# Altium PCB PCB1.PcbDoc (part 1 of 2)
Units mil, origin at the board's own origin, x right, y up, seen from the top; angles counter-clockwise.
Board outline 2604.27 x 2454.27 mil, 4 copper layers (Top Layer, GND, Power, Bottom Layer), stack 53.912 mil thick; 71 components, 89 nets, 388 pads, 132 vias.
Unrouted connection lines stored in the file: 46.
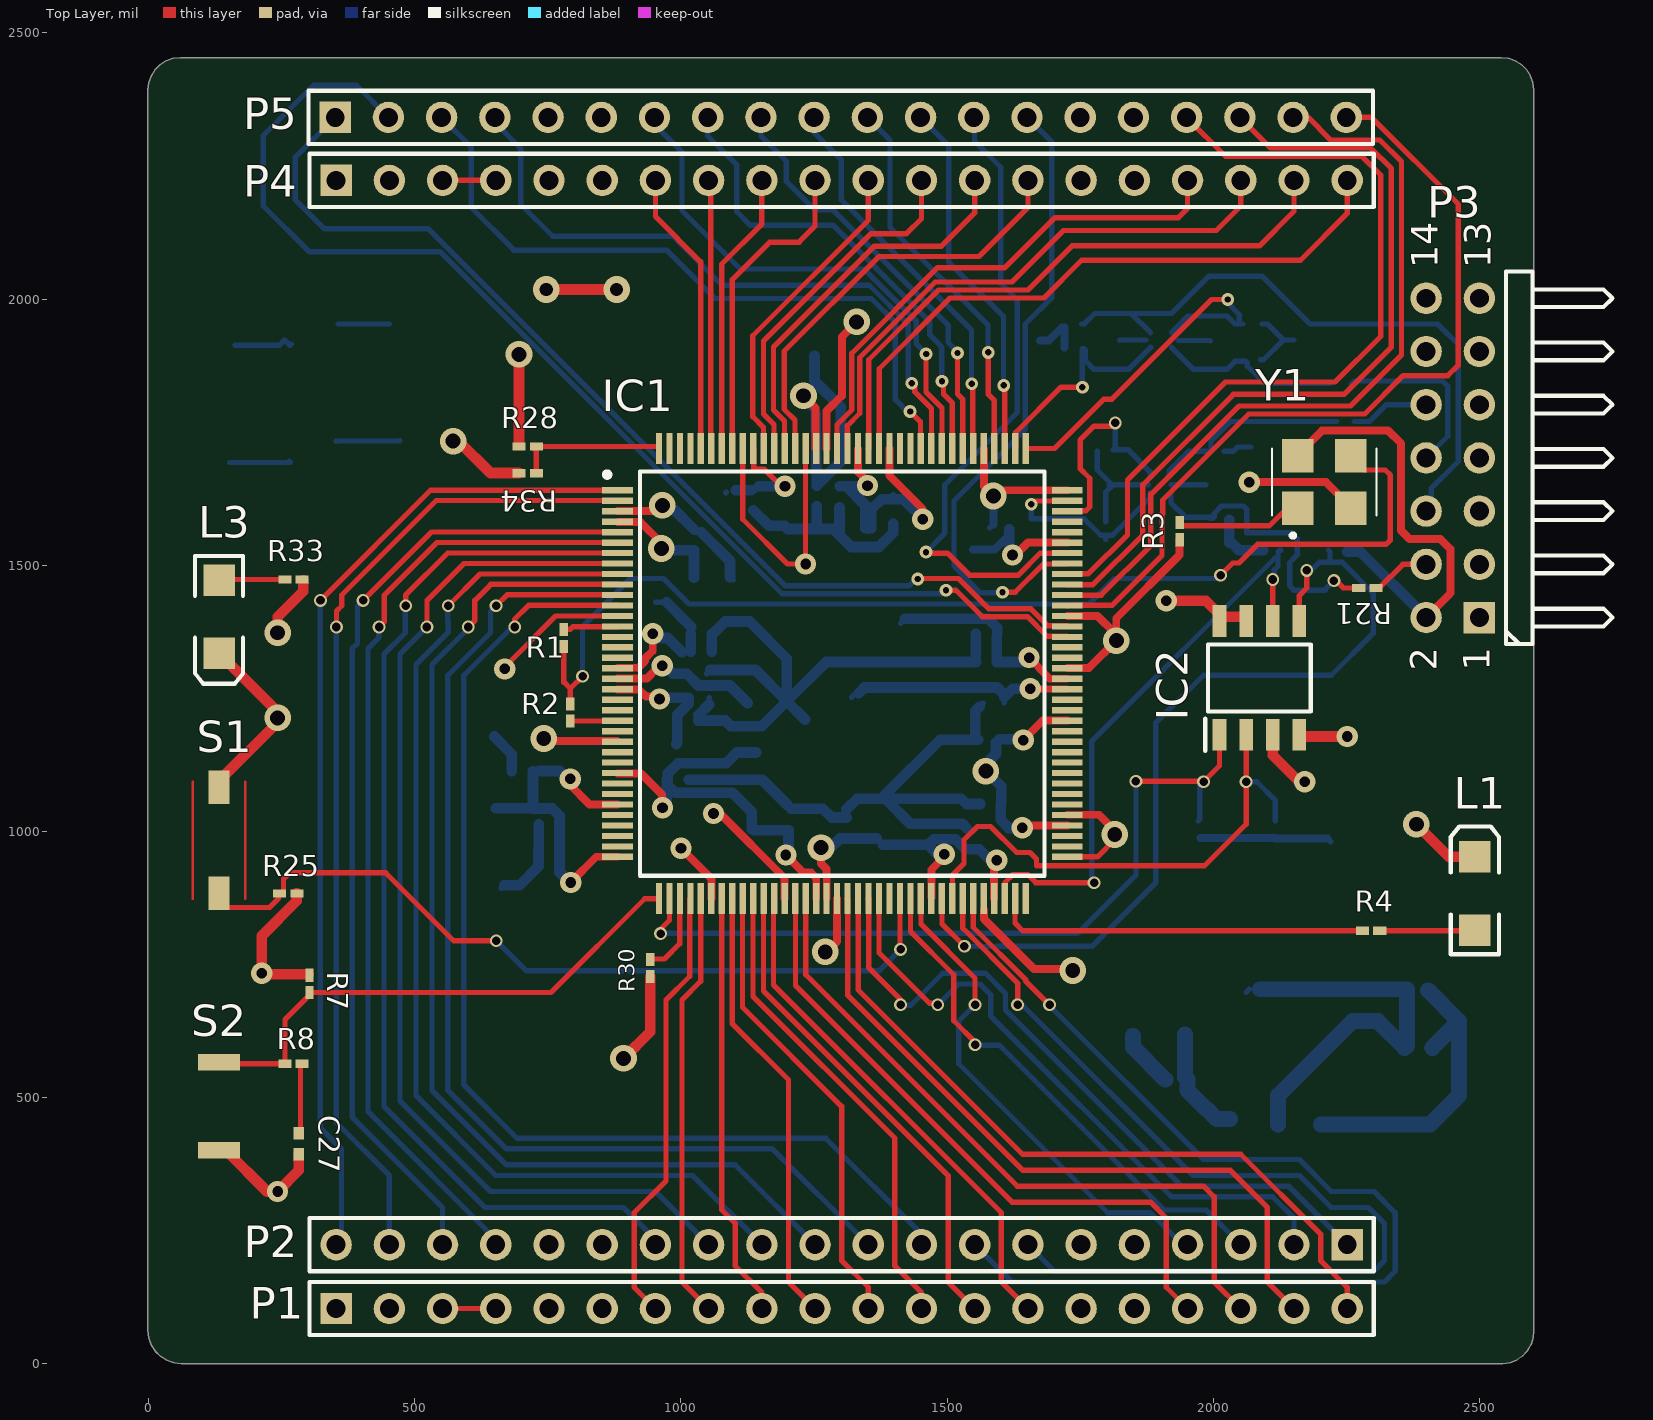
[diagram p0: Top Layer view]
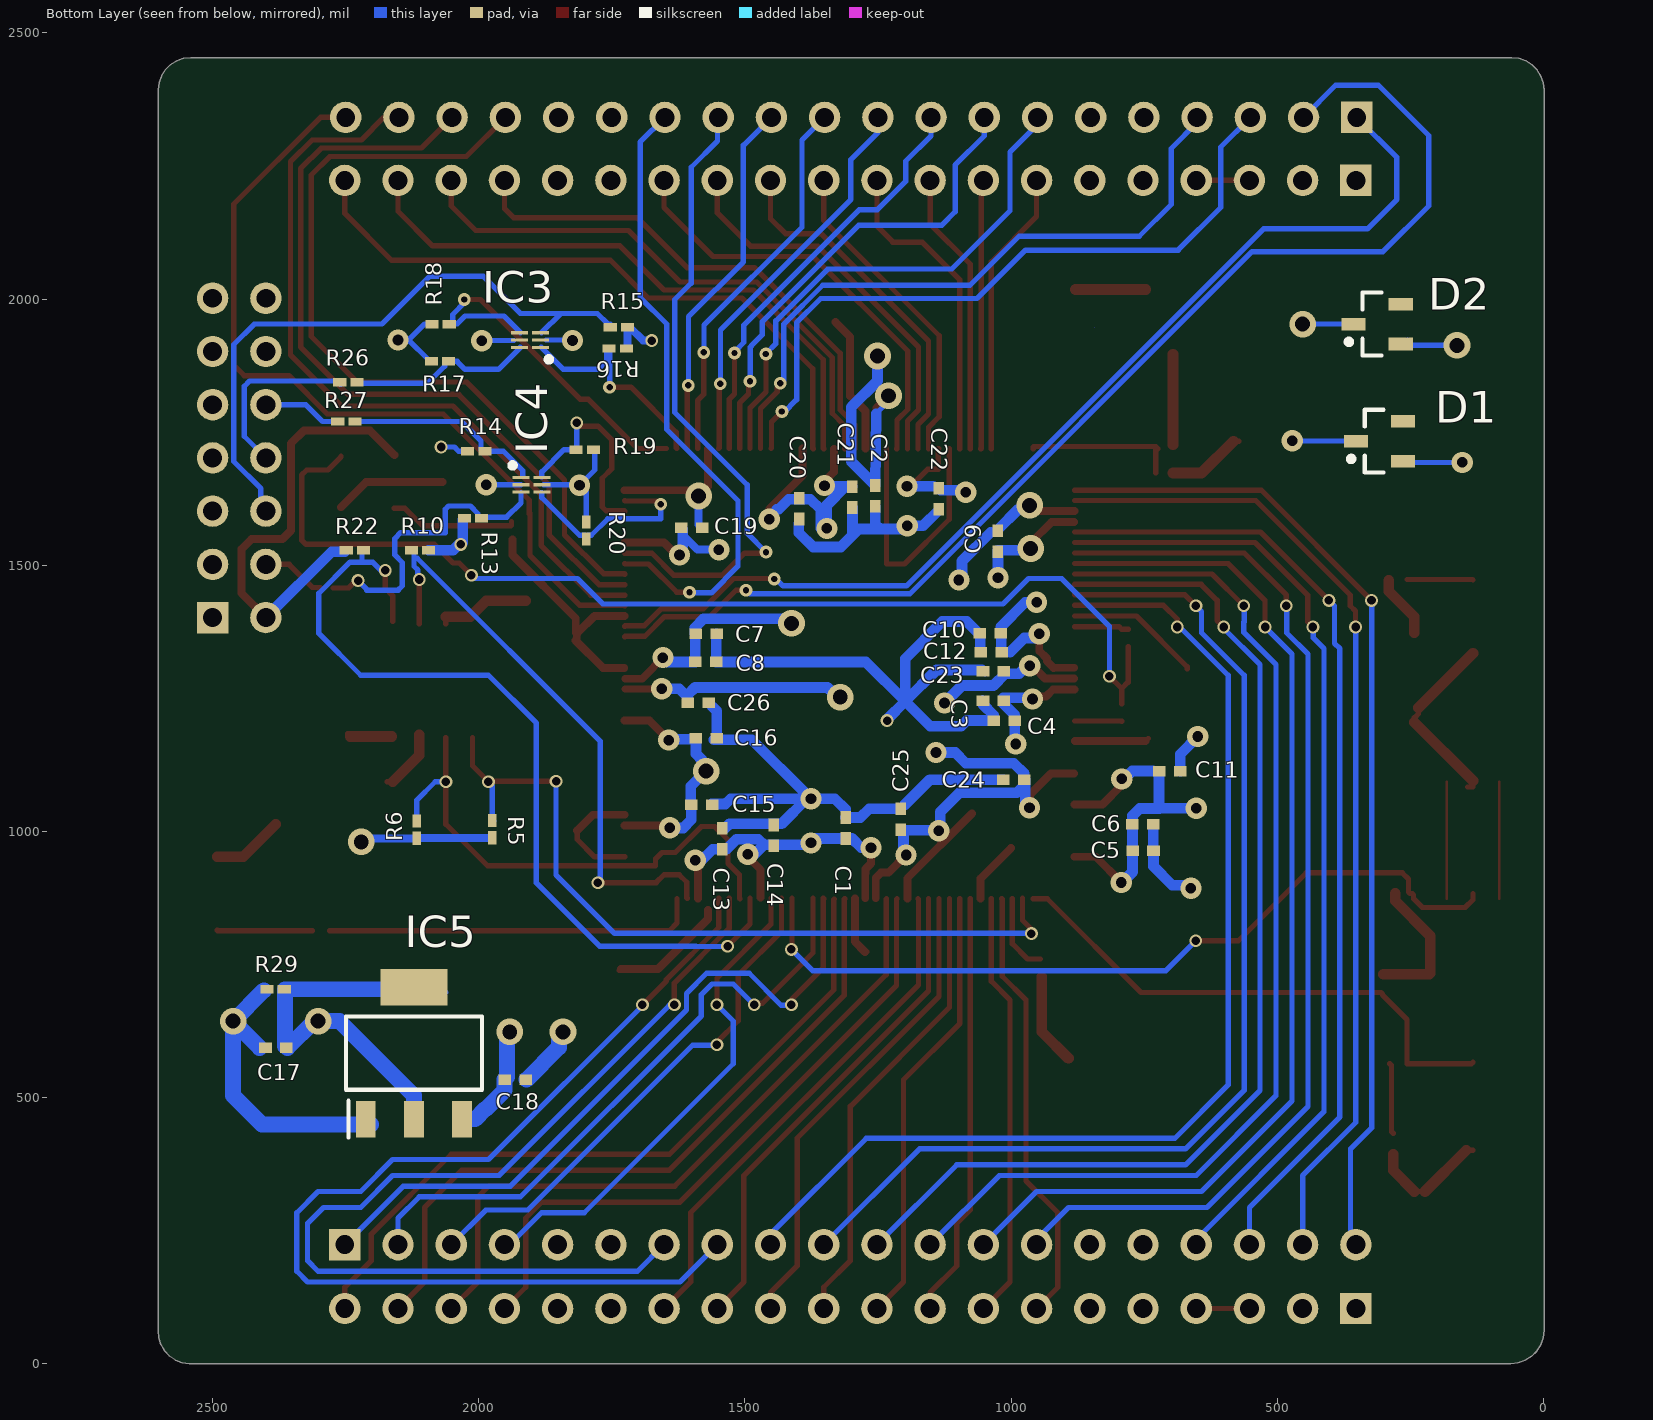
[diagram p1: Bottom Layer view, seen from below]
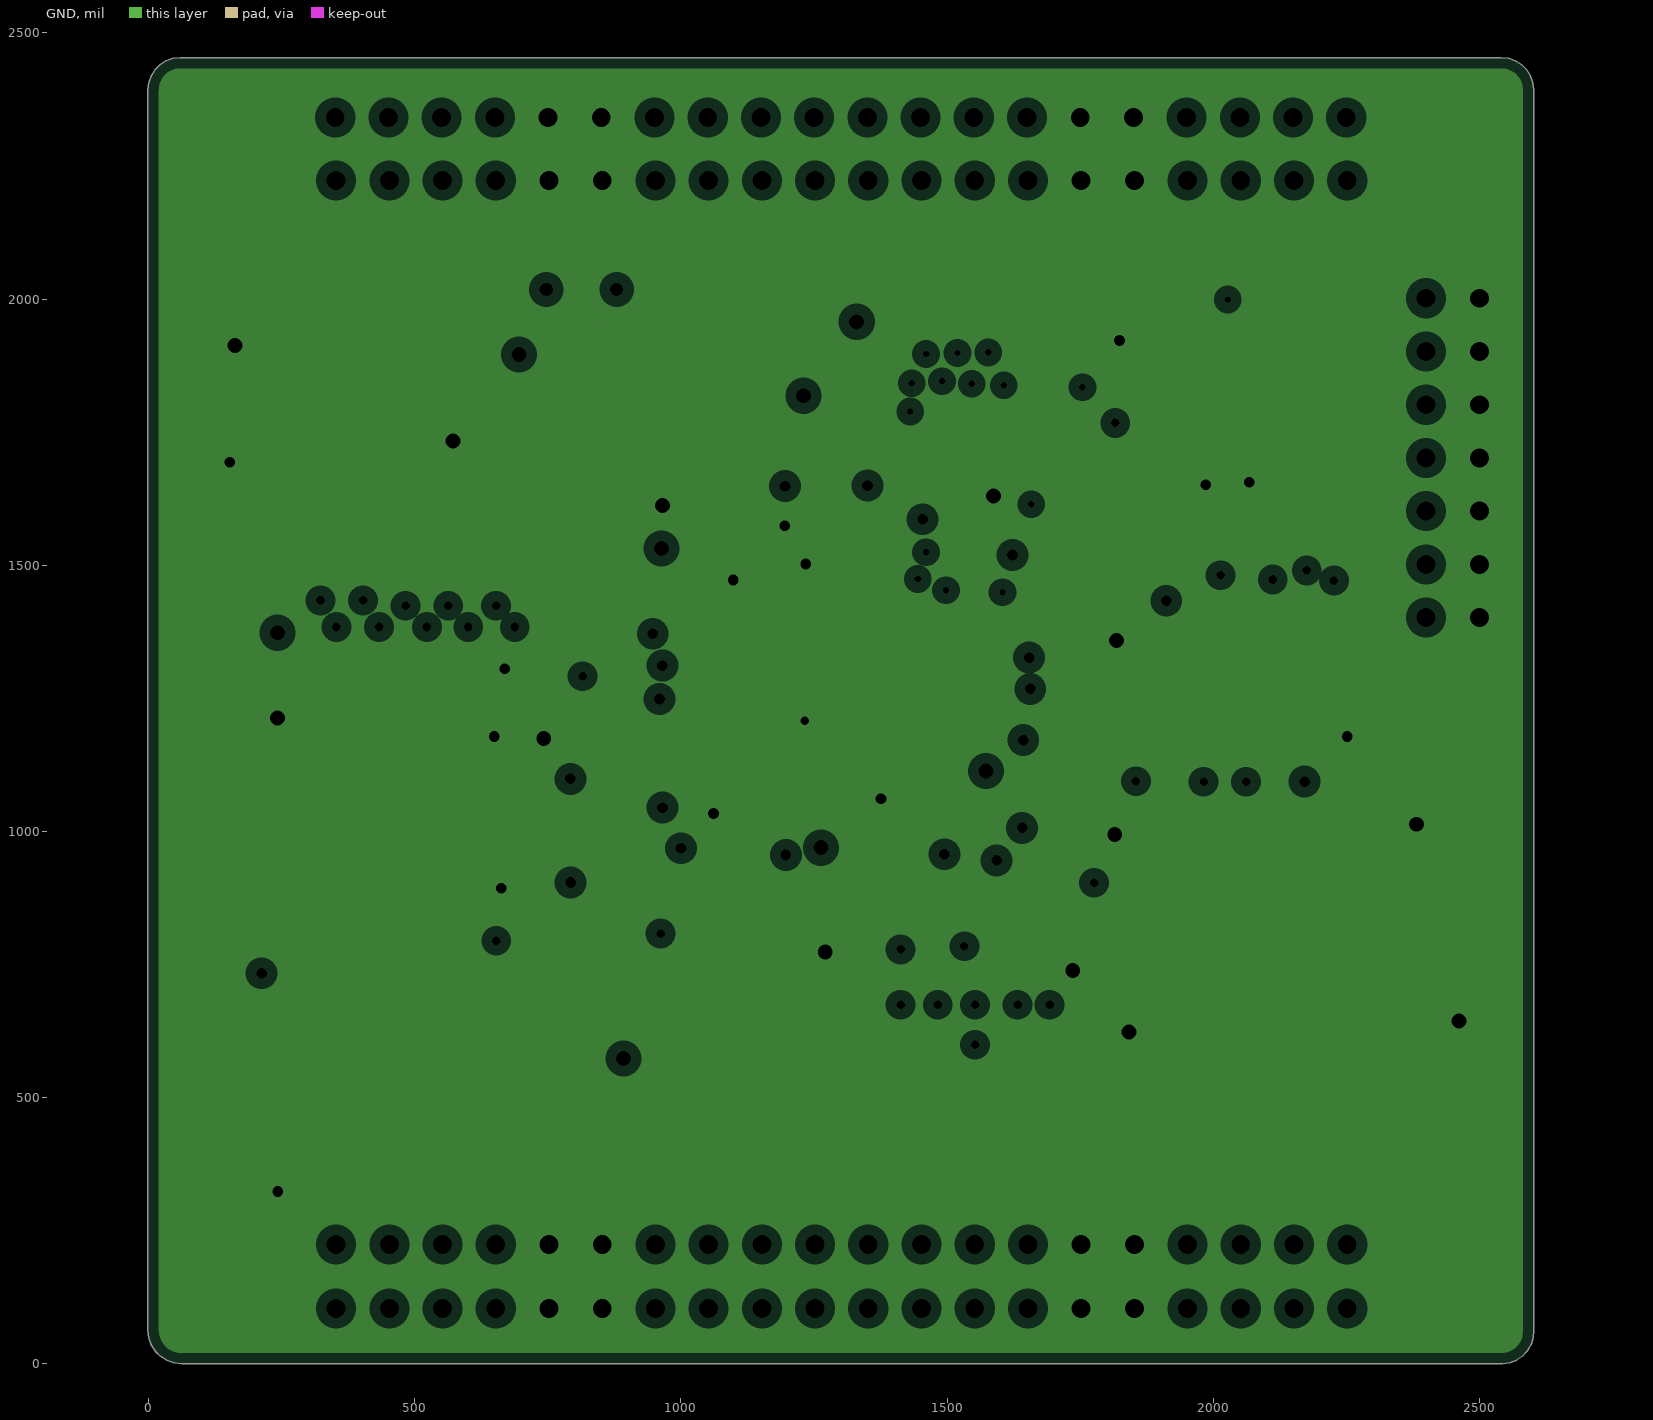
[diagram p2: GND, clearances drawn from the general rule]
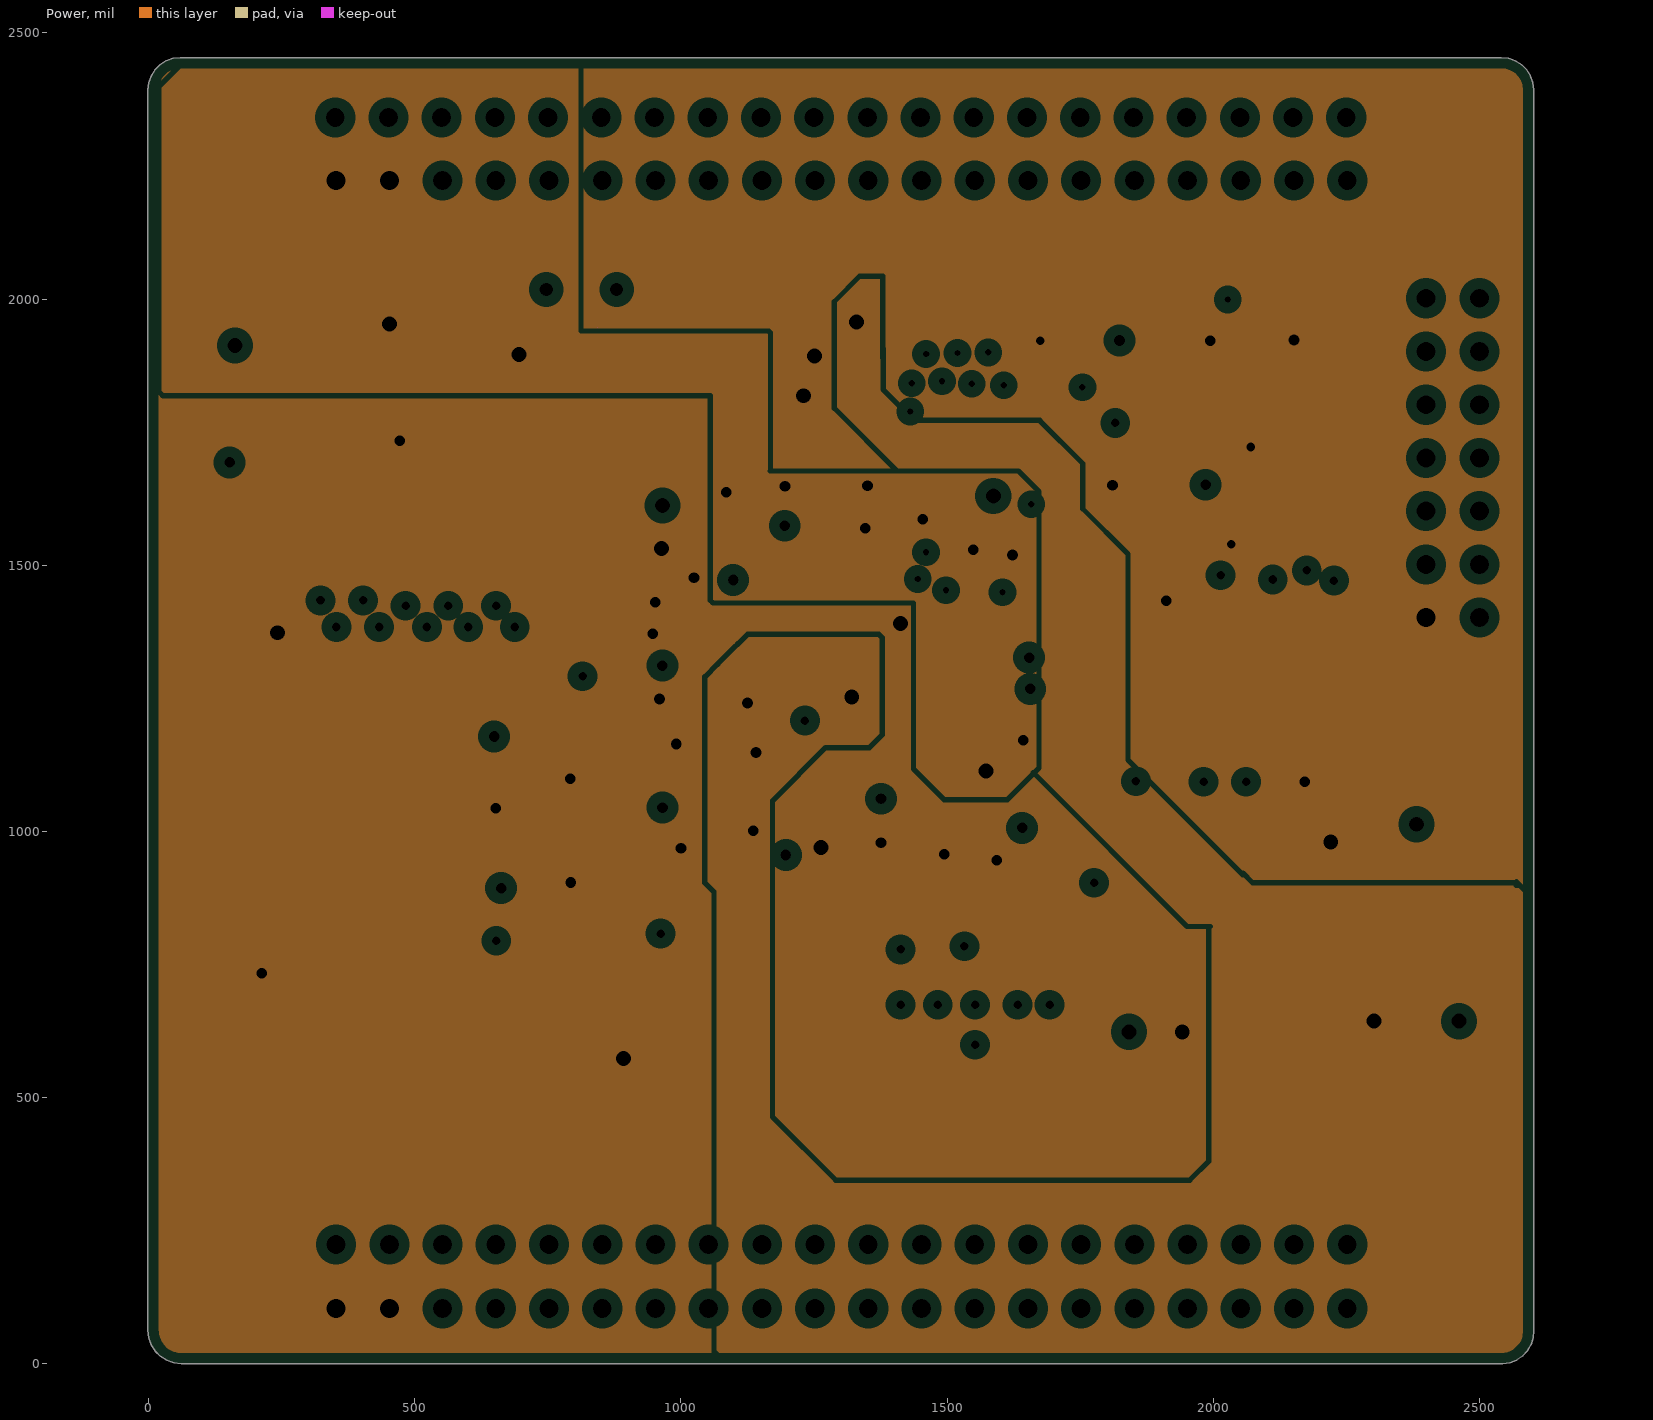
[diagram p3: Power, clearances drawn from the general rule]
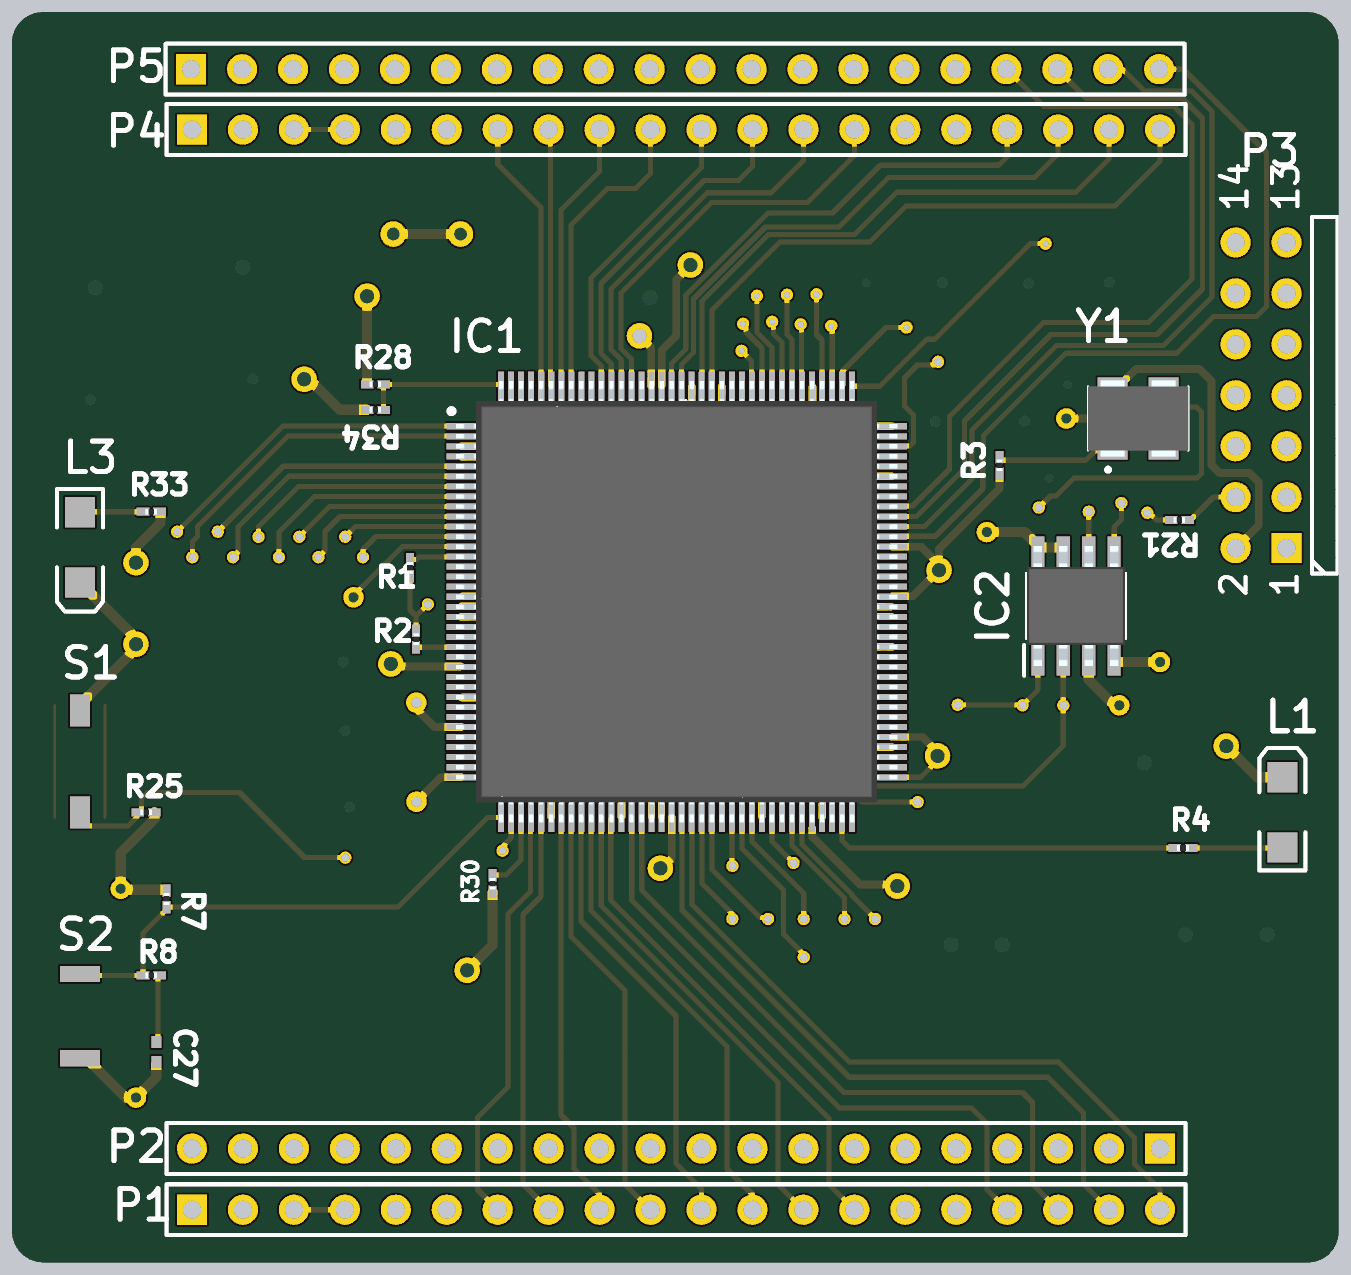
[diagram p5: 3D render of the assembled board from above, using the file's embedded part models]

## Layer stack, top to bottom
Top Solder: solder mask 1, SM-001, Dk 4
Top Layer: signal copper 1.3779
Dielectric 1: prepreg 5.1, PP-017, Dk 4.3
Dielectric 2: prepreg 5.1, PP-017, Dk 4.3
GND: plane copper 1.3779, net GND
Dielectric 3: core 28, Core-039, Dk 4.8
Power: plane copper 1.3779, net (Multiple Nets)
Dielectric 4: prepreg 5.1, PP-017, Dk 4.3
Dielectric 5: prepreg 5.1, PP-017, Dk 4.3
Bottom Layer: signal copper 1.3779
Bottom Solder: solder mask 1, SM-001, Dk 4

## Board outline
2602.59,61.43 2602.59,2393.3 2602.59,2393.32 2600.96,2406.84 2596.37,2419.66 2589.03,2431.14 2579.33,2440.7 2567.74,2447.86 2554.85,2452.26 2541.3,2453.69 59.11,2453.69 45.58,2452.16 32.73,2447.67 21.21,2440.43 11.58,2430.8 4.34,2419.28 -0.15,2406.43 -1.68,2392.9 -1.68,61.9 -0.08,47.98 4.57,34.76 12.04,22.9 21.97,13.01 33.85,5.57 47.08,0.97 61.01,-0.58 2544.31,-0.58 2544.37,-0.58 2557.7,1.35 2570.26,6.2 2581.43,13.72 2590.65,23.54 2597.46,35.17 2601.5,48.01
cut-out: 1373,-289
cut-out: 844,1946

## Design rules (kind name [scope] priority, off if disabled: settings)
Clearance [All] p1: gap=5 ignorepadtopadclearanceinfootprint=FALSE
HoleToHoleClearance [All] p1: gap=5 allowstackedmicrovias=TRUE
MinimumSolderMaskSliver [All] p1: minsoldermaskwidth=5
PlaneClearance [All] p1: clearance=20
PlaneConnect [All] p1: planeconnectstyle=Relief reliefexpansion=20 reliefentries=4 reliefconductorwidth=10 reliefairgap=10
PolygonConnect [All] p1: connectstyle=Relief reliefconductorwidth=10 reliefentries=4 polygonreliefangle="90 Angle" airgapwidth=10
RoutingVias [All] p1: holewidth=16 width=24 viastyle="Through Hole" minholewidth=16 minwidth=24 maxholewidth=28 maxwidth=50
SilkToSilkClearance [All] p1: silktosilkclearance=5
SilkToSolderMaskClearance [IsPad] p1: minsilkscreentomaskgap=5 clearancetoexposedcopper=TRUE
SolderMaskExpansion [All] p1: expansion=4
Width [All] p1: maxlimit=30 minlimit=10 preferedwidth=10
24 further rules are at their usual default settings.

## Components (designator, comment, footprint, x,y, rotation, side; value= is the part's Value field where it differs from the comment)
C1 "4.7μF" 0402 1311,1006 r270 bottom
C2 "4.7μF" 0402 1255,1630 r90 bottom
C3 "4.7μF" 0402 1033,1245 r180 bottom
C4 "4.7μF" 0402 1013,1208 r180 bottom
C5 "4.7μF" 0402 752,963 r0 bottom
C6 "4.7μF" 0402 752.31,1013 r0 bottom
C7 "4.7μF" 0402 1573,1371 r0 bottom
C8 "0.47μF" 0402 1574,1318 r0 bottom
C9 "4.7μF" 0402 1025,1545 r270 bottom
C10 "0.47μF" 0402 1039.03,1371.66 r180 bottom
C11 "0.47μF" 0402 702,1113 r0 bottom
C12 "4.7μF" 0402 1037,1336 r180 bottom
C13 "0.47μF" 0402 1543,986 r270 bottom
C14 "0.47μF" 0402 1446,992 r270 bottom
C15 "4.7μF" 0402 1581,1050 r0 bottom
C16 "0.47μF" 0402 1573,1175 r0 bottom
C17 "16V 226" 0402 2381.37,593 r180 bottom
C18 "Cap Semi" 0402 1932,533 r0 bottom value="16V 226"
C19 "0.47μF" 0402 1600,1570 r0 bottom
C20 "4.7μF" 0402 1398,1606.32 r90 bottom
C21 "0.47μF" 0402 1298,1628 r90 bottom
C22 "0.47μF" 0402 1136,1625 r90 bottom
C23 "4.7μF" 0402 1033,1301 r180 bottom
C24 "4.7μF" 0402 995,1097 r180 bottom
C25 "4.7μF" 0402 1207,1022.69 r270 bottom
C26 "0.47μF" 0402 1588,1241 r0 bottom
C27 "10μF" 0402 282,412.68 r90 top
D1 "Diode BBY31" SOT23_N 307.71,1733 r0 bottom
D2 "Diode BBY31" SOT23_N 312,1953 r0 bottom
IC1 "XC6SLX9-2TQG144C" QFP50P2200X2200X160-144N 1303.21,1296.24 r0 top locked
IC2 "M25P16-VMN6P" SOIC127P600X175-8N 2087,1288 r90 top
IC3 "SN74LVC2G17DSFR" SON35P100X100X40-6N 1904,1923 r0 bottom
IC4 "SN74LVC2G17DSFR" SON35P100X100X40-6N 1901.32,1651 r180 bottom
IC5 "TLV1117LV12DCYR" SOT230P700X180-4N 2122,583 r90 bottom
L1 "LED2" 3.2X1.6X1.1 2492,883 r90 top
L3 "LED2" 3.2X1.6X1.1 132,1403 r270 top
P1 "Header 20" HDR1X20 352,103 r0 top locked
P2 "Header 20" HDR1X20 2252,223 r180 top locked
P3 "JTAG" HDR2X7H 2500.31,1401.5 r90 top
P4 "Header 20" HDR1X20 352,2223 r0 top locked
P5 "Header 20" HDR1X20 350.31,2341.5 r0 top
R1 "47" RESC0603X28N 780,1363 r270 top
R2 "47" RESC0603X28N 792,1223 r90 top
R3 "000" RESC0603X28N 1937,1564 r270 top
R4 "102" RESC0603X28N 2297,813 r0 top
R5 "222" RESC0603X28N 1975,1004 r90 bottom
R6 "222" RESC0603X28N 2117,1003 r90 bottom
R7 "100" RESC0603X28N 302,713 r90 top
R8 "10K" RESC0603X28N 272,563 r180 top
R10 "222" RESC0603X28N 2110.78,1528 r0 bottom
R13 "102" RESC0603X28N 2011,1588 r0 bottom
R14 "102" RESC0603X28N 2005,1714 r0 bottom
R15 "102" RESC0603X28N 1737,1947 r180 bottom
R16 "102" RESC0603X28N 1739,1907 r180 bottom
R17 "102" RESC0603X28N 2073.22,1883 r0 bottom
R18 "102" RESC0603X28N 2072,1953 r0 bottom
R19 "102" RESC0603X28N 1801,1717 r180 bottom
R20 "102" RESC0603X28N 1798,1565 r90 bottom
R21 "47" RESC0603X28N 2290,1457 r0 top
R22 "222" RESC0603X28N 2233,1528 r180 bottom
R25 "4700" RESC0603X28N 262,883 r180 top
R26 "47" RESC0603X28N 2245.22,1844 r0 bottom
R27 "47" RESC0603X28N 2249,1770 r0 bottom
R28 "102" RESC0603X28N 712,1723 r0 top
R29 "102" RESC0603X28N 2382,703 r180 bottom
R30 "4700" RESC0603X28N 942,743 r90 top
R33 "102" RESC0603X28N 272,1473 r0 top
R34 "102" RESC0603X28N 712,1673 r0 top
S1 "CHS-01TA" CHS-01TA 132,983 r0 top
S2 "SKRKAEE010" SKRK 132,483 r90 top
Y1 "144-5018" 1445018 2209,1656 r0 top

## Footprints (in the part's own frame and the unit in brackets; to place one, negate y for a bottom-side part, rotate by r counter-clockwise, add the part's x,y. Pads: shape width x height; smd on the part's side, far side on the other; paste and mask are expansions set on the pad)
3.2X1.6X1.1 [mm] "SMT LED; 2 Flat Leads"
  rect 1.5x1.5 smd: 1(-1.75,0) 2(1.75,0)
  silkscreen extent -2.9,-1.15 3.2,1.15
0402 [mm] "Chip Capacitor, Body 1.0x0.5mm, IPC High Density"
  rect 0.6x0.5 smd: 1(-0.5,0) 2(0.5,0)
  body extent -0.55,-0.3 0.55,0.3, height 1.3
1445018 [mm]
  rect 1.5x1.6 smd: 1(-1.27,-1.25) 2(1.27,-1.25) 3(1.27,1.25) 4(-1.27,1.25)
  silkscreen extent -2.5,-2.6 2.5,1.6, body extent -2.5,-1.9 2.5,1.9, height 1.2
CHS-01TA [mm]
  rect 1x1.6 smd: S0(0,-2.54) SI(0,2.54)
  Top Layer lines w0.127: -1.25,-2.8 -1.25,2.8 ; 1.25,-2.8 1.25,2.8
HDR1X20 [mm] "Connector; Header; 20 Position"
  rect 1.5x1.5 hole 0.9: 1(0,0)
  round 1.5 hole 0.9: 2(2.54,0) 3(5.08,0) 4(7.62,0) 5(10.16,0) 6(12.7,0) 7(15.24,0) 8(17.78,0) 9(20.32,0) 10(22.86,0) 11(25.4,0) 12(27.94,0) 13(30.48,0) 14(33.02,0) 15(35.56,0) 16(38.1,0) 17(40.64,0) 18(43.18,0) 19(45.72,0) 20(48.26,0)
  silkscreen extent -1.27,-1.27 49.53,1.27
HDR2X7H [mm] "Connector; Header; 7x2 Position; Right Angle"
  rect 1.5x1.5 hole 0.9: 1(0,0)
  round 1.5 hole 0.9: 2(0,2.54) 3(2.54,0) 4(2.54,2.54) 5(5.08,0) 6(5.08,2.54) 7(7.62,0) 8(7.62,2.54) 9(10.16,0) 10(10.16,2.54) 11(12.7,0) 12(12.7,2.54) 13(15.24,0) 14(15.24,2.54)
  silkscreen extent -1.27,-6.35 16.51,-1.27
QFP50P2200X2200X160-144N [mm]
  rect 1.475x0.3 smd: 1(-10.738,8.75) 2(-10.738,8.25) 3(-10.738,7.75) 4(-10.738,7.25) 5(-10.738,6.75) 6(-10.738,6.25) 7(-10.738,5.75) 8(-10.738,5.25) 9(-10.738,4.75) 10(-10.738,4.25) 11(-10.738,3.75) 12(-10.738,3.25) 13(-10.738,2.75) 14(-10.738,2.25) 15(-10.738,1.75) 16(-10.738,1.25) 17(-10.738,0.75) 18(-10.738,0.25) 19(-10.738,-0.25) 20(-10.738,-0.75) 21(-10.738,-1.25) 22(-10.738,-1.75) 23(-10.738,-2.25) 24(-10.738,-2.75) 25(-10.738,-3.25) 26(-10.738,-3.75) 27(-10.738,-4.25) 28(-10.738,-4.75) 29(-10.738,-5.25) 30(-10.738,-5.75) 31(-10.738,-6.25) 32(-10.738,-6.75) 33(-10.738,-7.25) 34(-10.738,-7.75) 35(-10.738,-8.25) 36(-10.738,-8.75) 73(10.738,-8.75) 74(10.738,-8.25) 75(10.738,-7.75) 76(10.738,-7.25) 77(10.738,-6.75) 78(10.738,-6.25) 79(10.738,-5.75) 80(10.738,-5.25) 81(10.738,-4.75) 82(10.738,-4.25) 83(10.738,-3.75) 84(10.738,-3.25) 85(10.738,-2.75) 86(10.738,-2.25) 87(10.738,-1.75) 88(10.738,-1.25) 89(10.738,-0.75) 90(10.738,-0.25) 91(10.738,0.25) 92(10.738,0.75) 93(10.738,1.25) 94(10.738,1.75) 95(10.738,2.25) 96(10.738,2.75) 97(10.738,3.25) 98(10.738,3.75) 99(10.738,4.25) 100(10.738,4.75) 101(10.738,5.25) 102(10.738,5.75) 103(10.738,6.25) 104(10.738,6.75) 105(10.738,7.25) 106(10.738,7.75) 107(10.738,8.25) 108(10.738,8.75)
  rect 0.3x1.475 smd: 37(-8.75,-10.738) 38(-8.25,-10.738) 39(-7.75,-10.738) 40(-7.25,-10.738) 41(-6.75,-10.738) 42(-6.25,-10.738) 43(-5.75,-10.738) 44(-5.25,-10.738) 45(-4.75,-10.738) 46(-4.25,-10.738) 47(-3.75,-10.738) 48(-3.25,-10.738) 49(-2.75,-10.738) 50(-2.25,-10.738) 51(-1.75,-10.738) 52(-1.25,-10.738) 53(-0.75,-10.738) 54(-0.25,-10.738) 55(0.25,-10.738) 56(0.75,-10.738) 57(1.25,-10.738) 58(1.75,-10.738) 59(2.25,-10.738) 60(2.75,-10.738) 61(3.25,-10.738) 62(3.75,-10.738) 63(4.25,-10.738) 64(4.75,-10.738) 65(5.25,-10.738) 66(5.75,-10.738) 67(6.25,-10.738) 68(6.75,-10.738) 69(7.25,-10.738) 70(7.75,-10.738) 71(8.25,-10.738) 72(8.75,-10.738) 109(8.75,10.738) 110(8.25,10.738) 111(7.75,10.738) 112(7.25,10.738) 113(6.75,10.738) 114(6.25,10.738) 115(5.75,10.738) 116(5.25,10.738) 117(4.75,10.738) 118(4.25,10.738) 119(3.75,10.738) 120(3.25,10.738) 121(2.75,10.738) 122(2.25,10.738) 123(1.75,10.738) 124(1.25,10.738) 125(0.75,10.738) 126(0.25,10.738) 127(-0.25,10.738) 128(-0.75,10.738) 129(-1.25,10.738) 130(-1.75,10.738) 131(-2.25,10.738) 132(-2.75,10.738) 133(-3.25,10.738) 134(-3.75,10.738) 135(-4.25,10.738) 136(-4.75,10.738) 137(-5.25,10.738) 138(-5.75,10.738) 139(-6.25,10.738) 140(-6.75,10.738) 141(-7.25,10.738) 142(-7.75,10.738) 143(-8.25,10.738) 144(-8.75,10.738)
  silkscreen extent -11.35,-9.65 9.65,9.65, body extent -11,-11 11,11, height 1.6
RESC0603X28N [mm]
  rect 0.625x0.4 smd: 1(-0.412,0) 2(0.412,0)
  body extent -0.29,-0.15 0.29,0.15, height 0.28
SKRK [mm]
  rect 0.8x2 smd: 1(-2.1,0) 2(2.1,0)
SOIC127P600X175-8N [mm]
  rect 1.525x0.65 smd: 1(-2.712,1.905) 2(-2.712,0.635) 3(-2.712,-0.635) 4(-2.712,-1.905) 5(2.712,-1.905) 6(2.712,-0.635) 7(2.712,0.635) 8(2.712,1.905)
  silkscreen extent -3.47,-2.45 1.6,2.58, body extent -3,-2.45 3,2.45, height 1.75
SON35P100X100X40-6N [mm]
  rect 0.8x0.15 smd: 1(-0.5,0.35) 2(-0.5,0) 3(-0.5,-0.35) 4(0.5,-0.35) 5(0.5,0) 6(0.5,0.35)
  silkscreen extent -1.02,0.8 -0.77,1.05, body extent -0.55,-0.5 0.55,0.5, height 0.4
SOT23_N [mm] "SOT23, 3-Leads, Body 2.9x1.3mm, Pitch 0.95mm, Lead Span 2.3mm - Reverse Pinning, IPC Medium Density"
  rect 1.15x0.6 smd: 1(1.125,0) 2(-1.125,-0.95) 3(-1.125,0.95)
  silkscreen extent -0.2,-1.5 1.48,1.5, body extent -0.7,-1.5 0.7,1.5, height 1.1
SOT230P700X180-4N [mm]
  rect 1.75x0.95 smd: 1(-3.15,2.3) 2(-3.15,0) 3(-3.15,-2.3)
  rect 1.75x3.2 smd: 4(3.15,0)
  silkscreen extent -4.02,-3.25 1.75,3.25, body extent -3.5,-3.25 3.5,3.25, height 1.8

## Part data
C1 C2 C3 C4 C5 C6 C7 C8 C9 C10 C11 C12 C13 C14 C15 C16 C17 C19 C20 C21 C22 C23 C24 C25 C26 C27: library part "Cap Semi", "Capacitor (Semiconductor SIM Model)", LatestRevisionDate=29-May-2009, LatestRevisionNote="IPC-7351 Footprint Added.", PackageDescription="Chip Capacitor", PackageReference=C1206, Published=8-Jun-2000, Publisher="Altium Limited"
C18: "Capacitor (Semiconductor SIM Model)", LatestRevisionDate=29-May-2009, LatestRevisionNote="IPC-7351 Footprint Added.", PackageDescription="Chip Capacitor", PackageReference=C1206, Published=8-Jun-2000, Publisher="Altium Limited"
D1 D2: "SOT23 Silicon Planar Variable Capacitance Diode", ComponentLink1Description="Manufacturer Link", ComponentLink1URL=http://www.zetex.com/, ComponentLink2Description=Datasheet, ComponentLink2URL=www.zetex.com/3.0/pdf/BBY31.pdf, DatasheetVersion=Jan-1998, LatestRevisionDate=29-May-2009, LatestRevisionNote="IPC-7351 Footprint Added.", Note="Pin 2 is not connected and not drawn.", PackageDescription="3-Pin SOT-23 Package 0.95 mm Pitch, 2.3 mm Lead Span - Reverse Pinning", PackageReference=SOT23, PackageVersion=1996, Published=8-Jun-2000, Publisher="Altium Limited"
IC1: "Integrated Circuit", Manufacturer_Name=XILINX, Mouser Part Number=217-XC6SLX9-2TQG144C, RS Part Number=7276011P, Datasheet Link=https://www.xilinx.com/support/documentation/data_sheets/ds160.pdf, Height=1.6mm, Manufacturer_Part_Number=XC6SLX9-2TQG144C, Mouser Price/Stock=https://www.mouser.com/Search/Refine.aspx?Keyword=217-XC6SLX9-2TQG144C, RS Price/Stock=http://uk.rs-online.com/web/p/products/7276011P
IC2: "Integrated Circuit", Manufacturer_Name=Micron, Mouser Part Number=340-180484, RS Part Number=7824601P, Datasheet Link=https://www.micron.com/~/media/documents/products/data-sheet/nor-flash/serial-nor/m25p/m25p16.pdf, Height=1.75mm, Manufacturer_Part_Number=M25P16-VMN6P, Mouser Price/Stock=https://www.mouser.com/Search/Refine.aspx?Keyword=340-180484, RS Price/Stock=http://uk.rs-online.com/web/p/products/7824601P
IC3 IC4: "Integrated Circuit", Manufacturer_Name="Texas Instruments", Mouser Part Number=595-SN74LVC2G17DSFR, Datasheet Link=http://www.ti.com/lit/gpn/sn74lvc2g17, Height=0.4mm, Manufacturer_Part_Number=SN74LVC2G17DSFR, Mouser Price/Stock=https://www.mouser.com/Search/Refine.aspx?Keyword=595-SN74LVC2G17DSFR
IC5: "Integrated Circuit", Manufacturer_Name="Texas Instruments", Mouser Part Number=595-TLV1117LV12DCYR, RS Part Number=8253628P, Datasheet Link=http://www.ti.com/lit/gpn/tlv1117lv, Height=1.8mm, Manufacturer_Part_Number=TLV1117LV12DCYR, Mouser Price/Stock=https://www.mouser.com/Search/Refine.aspx?Keyword=595-TLV1117LV12DCYR, RS Price/Stock=http://uk.rs-online.com/web/p/products/8253628P
L1 L3: "Typical RED, GREEN, YELLOW, AMBER GaAs LED", LatestRevisionDate=17-Jul-2002, LatestRevisionNote="Re-released for DXP Platform.", PackageDescription="SM LED; 2 Flat Leads", PackageReference=3.2X1.6X1.1, PackageVersion=Feb-2002, Published=8-Jun-2000, Publisher="Altium Limited"
P1 P2 P4 P5: "Header, 20-Pin", LatestRevisionDate=17-Jul-2002, LatestRevisionNote="Re-released for DXP Platform.", Publisher="Altium Limited"
P3: library part "Header 7X2H", "Header, 7-Pin, Dual row, Right Angle", LatestRevisionDate=17-Jul-2002, LatestRevisionNote="Re-released for DXP Platform.", Publisher="Altium Limited"
R1 R2 R3 R4 R5 R6 R7 R8 R10 R13 R14 R15 R16 R17 R18 R19 R20 R21 R22 R25 R26 R27 R28 R29 R30 R33 R34: library part CPF0201D100RE1, "Resistor", Manufacturer_Name="TE Connectivity", Mouser Part Number=279-CPF0201D100RE1, RS Part Number=7549192, Datasheet Link=http://www.te.com/commerce/DocumentDelivery/DDEController?Action=showdoc&DocId=Data+Sheet%7F1773200-1%7FA%7Fpdf%7FEnglish%7FENG_DS_1773200-1_A.pdf%7F4-2176215-6, Height=0.28mm, Manufacturer_Part_Number=CPF0201D100RE1, Mouser Price/Stock=https://www.mouser.com/Search/Refine.aspx?Keyword=279-CPF0201D100RE1, RS Price/Stock=http://uk.rs-online.com/web/p/products/7549192
S1: "Dip Switch SPST 1 Position Surface Mount Slide _Standard_ Actuator 100mA 6VDC", Package=None, Availability=Unavailable, MF="Nidec Copal", MP=CHS-01TA, Price=None, SnapEDA_Link=https://www.snapeda.com/parts/CHS-01TA/Nidec%20Copal%20Electronics/view-part/2873101/?ref=snap
S2: "Switch Tactile N.O. SPST Round Button Gull Wing 0.05A 12VDC 1.57N SMD T/R", Package=None, Availability=Unavailable, MF=ALPS, MP=SKRKAEE010, Price=None, SnapEDA_Link=https://www.snapeda.com/parts/SKRKAEE010/ALPS/view-part/380772/?ref=snap
Y1: "Crystal or Oscillator", Manufacturer_Name="RS Components", Datasheet Link=https://docs-emea.rs-online.com/webdocs/15dc/0900766b815dc7b7.pdf, Height=1.1mm, Manufacturer_Part_Number=144-5018

## Via types
v1: diameter 24, hole 16, Top Layer to Bottom Layer, 29 vias
v2: diameter 40, hole 20, Top Layer to Bottom Layer, 17 vias
v3: diameter 40, hole 20, Power to Bottom Layer, 16 vias
v4: diameter 24, hole 12, Top Layer to Bottom Layer, 15 vias
v5: diameter 50, hole 28, Power to Bottom Layer, 8 vias
v6: diameter 50, hole 28, Top Layer to GND, 8 vias
v7: diameter 40, hole 20, GND to Bottom Layer, 8 vias
v8: diameter 50, hole 28, Top Layer to Power, 7 vias
v9: diameter 40, hole 20, Top Layer to GND, 6 vias
v10: diameter 40, hole 20, Top Layer to Power, 4 vias
v11: diameter 50, hole 28, GND to Bottom Layer, 4 vias
v12: diameter 50, hole 28, Top Layer to Bottom Layer, 3 vias
v13: diameter 24, hole 16, Power to Bottom Layer, 3 vias
v14: diameter 50, hole 25, Top Layer to Power, 2 vias
v15: diameter 24, hole 16, GND to Bottom Layer, 1 vias
v16: diameter 24/24 (per signal layer), hole 16, Top Layer to Bottom Layer, 1 vias

## Nets (pads, with @x,y where several pads share a name; then routed paths per layer and width w, separated by ;. In a path a pad name is that pad's centre, name@x,y a point inside that pad or via, vN(x,y) a via of type N, cw(c..) or ccw(c..) an arc to the next point about the centre after c; other vN are vias at no path point)
GCLK_50A: IC1.14 R1.1 | length 102.2
  Top Layer w10: R1.1@780,1379.22 792,1379.22 797.12,1384.34 IC1.14@880.03,1384.34
GCLK_50B: IC1.23 R2.1 | length 88.2
  Top Layer w10: R2.1@792,1206.78 792.2,1206.98 879.84,1206.98 IC1.23@880.03,1207.17
GND: C1.1 C2.1 C3.1 C4.1 C5.1 C6.1 C7.1 C8.1 C9.1 C10.1 C11.1 C12.1 C13.1 C14.1 C15.1 C16.1 C17.1 C18.1 C19.1 C20.1 C21.1 C22.1 C23.1 C24.1 C25.1 C26.1 C27.1 D1.3 D2.3 IC1.3 IC1.13 IC1.25 IC1.49 IC1.54 IC1.68 IC1.73 IC1.77 IC1.91 IC1.96 IC1.108 IC1.113 IC1.130 IC1.136 IC2.4 IC3.2 IC4.2 IC5.1 L1.2 L3.2 P1.5 P1.6 P1.15 P1.16 P2.5 P2.6 P2.15 P2.16 P3.1 P3.3 P3.5 P3.7 P3.9 P3.11 P3.13 P4.5 P4.6 P4.15 P4.16 P5.5 P5.6 P5.15 P5.16 R3.2 R29.1 R34.1 S1.SI S2.1 Y1.2 | length 7889.6
  Top Layer w10: S2.1@132,400.32 S2.1@144.68,400.32 ; S1.SI@132,1094.81 S1.SI@132,1083 S1.SI@142,1083 ; 222,323 v9(242,323) ; v6@234.35,1231.76 234.35,1220.65 v6(242,1213) v6@242,1204.81 ; v6(572,1733) v6@582,1733 ; v9(669,1305) 669,1309 764.51,1404.51 IC1.13@880.46,1404.51 ; v6(742.21,1174.24) v6@747.26,1169.2 ; IC1.25@879.55,1169.2 IC1.25@880.46,1168.29 ; IC1.3@880.67,1601.61 IC1.3@880.91,1601.36 ; v12@943.51,1601.36 954.39,1612.24 v12(965.21,1612.24) ; IC1.136@1116.2,1719 1116.2,1586.25 1200.21,1502.24 v9(1234.21,1502.24) 1234.21,1718.9 IC1.130@1234.32,1719 ; v6(1271.21,773.24) v6@1274.21,773.24 ; IC1.113@1568.96,1719 IC1.113@1569.87,1718.09 ; v6@1569.87,1647.59 1587,1630.46 v6(1587,1630) 1597.82,1630 v6@1608.56,1640.73 ; IC1.73@1725.97,951.76 1782.72,951.76 1815.21,984.24 v6(1815.21,993.74) v6@1815.21,1001.18 ; IC1.91@1725.97,1306.09 IC1.91@1726.87,1306.99 ; v6@1733.21,741.24 v6(1736.21,738.24) ; v6@1814.21,1373.24 1814.21,1362.24 v6(1818.21,1358.24) v6@1818.21,1373.24 ; IC2.4@2162,1176.23 IC2.4@2163.77,1178 ; v9@2242,1178 v9@2247,1183 ; Y1.2@2259,1606.79 Y1.2@2259,1608.76
  Top Layer w14: IC1.77@1725.97,1030.5 1785.9,1030.5
  Top Layer w15: v6@747.26,1169.2 IC1.25@879.55,1169.2 ; IC1.3@880.91,1601.36 v12@943.51,1601.36 ; v9@1073.25,1033.24 1194.94,911.55 IC1.49@1194.94,873.49 ; v6@1274.21,773.24 1293.37,792.4 IC1.54@1293.37,873.49 ; IC1.68@1569.22,851.95 1569.22,835.27 1663.25,741.24 v6@1733.21,741.24 ; v6@1569.87,1647.59 IC1.113@1569.87,1718.09 ; v6@1608.56,1640.73 IC1.108@1725.97,1640.73 ; IC1.96@1725.97,1404.51 1782.94,1404.51 v6@1814.21,1373.24 ; IC1.91@1726.87,1306.99 1766.96,1306.99 v6(1818.21,1358.24) ; 1785.9,1030.5 v6@1815.21,1001.18 ; v6@1818,1373 1818,1400 1937,1519 R3.2@1937,1547.78 ; v9(2068,1656) 2211.76,1656 Y1.2@2259,1608.76
  Top Layer w20: S1.SI@132,1094.81 v6@242,1204.81 ; L3.2@132,1334.1 v6@234.35,1231.76 ; S2.1@144.68,400.32 222,323 ; v9(242,323) 282,363 C27.1@282,393 ; v6@582,1733 642,1673 R34.1@695.78,1673 ; IC2.4@2163.77,1178 v9@2242,1178 ; v8(2382,1013) 2443.1,951.9 L1.2@2492,951.9
  Bottom Layer w10: v7(152,1693) 266.01,1693 D1.3@263.42,1695.6 ; v11(162,1913) 245.11,1913 255.11,1923 265.11,1913 D2.3@267.71,1915.6 ; v7(662,893) v7@667.74,898.74 ; C5.1@732.32,963 C5.1@732.47,963.16 ; C6.1@732.47,1012.84 C6.1@732.63,1013 ; v12@974.11,1612 981.52,1604.59 v12@987.06,1604.59 ; C9.1@1024.2,1567.46 1024.2,1561.91 1038.09,1561.91 ; C4.1@1032.69,1208 1032.69,1217.84 ; C23.1@1048.37,1296 C23.1@1055.37,1303 ; C3.1@1052.81,1250.13 C3.1@1053.69,1251 ; C12.1@1056.68,1336 C12.1@1057.7,1337.02 ; C10.1@1057.7,1370.64 C10.1@1058.72,1371.66 C10.1@1060.68,1371.66 ; v7@1092.26,1477.74 v7(1098,1472) ; C22.1@1136,1603.35 C22.1@1136,1605.32 ; v7(1195,1574) v7@1201,1568 ; C25.1@1200.19,1049.18 1202.16,1049.18 1207,1044.34 C25.1@1207,1042.37 ; v15(1233,1208) v15@1233,1210 ; C1.1@1311,1025.69 1311,1041 ; v7(1376,1061) v7@1384,1061 ; C13.1@1537,1005.69 C13.1@1543,1005.69 ; C7.1@1553.32,1371 C7.1@1553.82,1370.5 ; C8.1@1553.82,1318.5 C8.1@1554.32,1318 ; C16.1@1558.32,1172 C16.1@1560.32,1174 ; C15.1@1561.32,1050 C15.1@1562.32,1051 ; C26.1@1561.51,1234.19 1561.51,1236.16 1566.35,1241 C26.1@1568.32,1241 ; C19.1@1580.31,1570 C19.1@1587,1576.69 ; v7(1824.17,1922.17) 1825,1923 IC3.2@1874,1923 ; v11(1842,623) v11@1849.65,615.35 ; C18.1@1910.35,533 C18.1@1912.32,533 ; IC4.2@1921,1651 v7(1986,1651) ; C17.1@2401.05,593 C17.1@2412,593
  Bottom Layer w15: C19.1@1587,1576.69 v6(1587,1630)
  Bottom Layer w20: v7(649,1178) 682.31,1144.69 C11.1@682.31,1113 ; v7@667.74,898.74 696.78,898.74 732.32,934.28 C5.1@732.32,963 ; C5.1@732.47,963.16 C6.1@732.47,1012.84 ; v12@987.06,1604.59 C9.1@1024.2,1567.46 ; C24.1@1014.69,1097 1152.37,1097 C25.1@1200.19,1049.18 ; C4.1@1032.69,1208 1083,1208 1094,1197 1152,1197 1199,1244 ; 1032.69,1217.84 C3.1@1052.81,1237.97 ; 1038.09,1561.91 1092.26,1507.74 v7@1092.26,1477.74 ; C23.1@1055.37,1303 1140,1303 1199,1244 ; C12.1@1057.7,1337.02 C10.1@1057.7,1370.64 ; C10.1@1060.68,1371.66 1083.03,1394 1129,1394 1199,1324 1199,1244 ; C22.1@1136,1603.35 1165.35,1574 v7(1195,1574) ; v7@1201,1568 1246,1568 ; C25.1@1207,1042.37 1266.63,1042.37 1283.31,1025.69 C1.1@1311,1025.69 ; v15@1233,1210 1199,1244 ; C2.1@1255,1610.32 1255,1577 1246,1568 ; C21.1@1298,1608.32 1298,1556 ; 1311,1041 1331,1061 v7(1376,1061) ; v7@1383.16,1068.16 1487,1172 C16.1@1558.32,1172 ; C20.1@1399,1578 1399,1561 1372,1534 1320,1534 1298,1556 ; C13.1@1537,1005.69 1529,1013.68 1431.32,1013.68 1384,1061 1527,1061 1537,1051 C15.1@1562.32,1051 ; C16.1@1553.32,1175 1553.32,1226 C26.1@1561.51,1234.19 ; C8.1@1553.82,1318.5 C7.1@1553.82,1370.5 ; C8.1@1554.32,1318 1273,1318 1199,1244 ; 1246,1568 1286,1568 1298,1556
  Bottom Layer w30: v11@1849.65,615.35 1849.65,593.69 C18.1@1910.35,533 ; IC5.1@2202.55,448.98 2407.98,448.98 2462,503 v11(2462,643) ; R29.1@2404.16,700.84 v11(2462,643) ; C17.1@2412,593 v11(2462,643)
  other v9: 1061.21,1033.24 2252,1178
  other v11: 1587,1630
IOA0: IC1.40 P1.7 | length 830.2
  Top Layer w10: P1.7@952,103 912,143 912,283 972,343 972,683 1016.45,727.45 1016.45,872.09 IC1.40@1017.35,873
IOA1: IC1.41 P1.8 | length 805.2
  Top Layer w10: IC1.41@1037.04,873 1037.04,717.96 1002,682.92 1002,153 P1.8@1052,103
IOA2: IC1.43 P1.9 | length 801.3
  Top Layer w10: IC1.43@1076.41,873 1076.41,288.59 1102,263 1102,183 1152,133 P1.9@1152,103
IOA3: IC1.44 P1.10 | length 834.6
  Top Layer w10: IC1.44@1096.09,873 1096.09,638.91 1202,533 1202,153 P1.10@1252,103
IOA4: IC1.45 P1.11 | length 867.8
  Top Layer w10: IC1.45@1115.78,873 1115.78,669.22 1302,483 1302,193 1352,143 P1.11@1352,103
IOA5: IC1.46 P1.12 | length 901.1
  Top Layer w10: IC1.46@1135.46,873 1135.46,689.54 1402,423 1402,183 1452,133 P1.12@1452,103
IOA6: IC1.47 P1.13 | length 934.4
  Top Layer w10: IC1.47@1155.15,873 1155.15,699.85 1502,353 1502,153 P1.13@1552,103
IOA7: IC1.48 P1.14 | length 968.4
  Top Layer w10: IC1.48@1174.83,873 1173.93,872.09 1173.93,711.07 1602,283 1602,153 P1.14@1652,103
IOA8: IC1.50 P1.17 | length 1227.9
  Top Layer w10: IC1.50@1214.2,873 1215.11,872.09 1215.11,709.89 1622,303 1882,303 1912,273 1912,143 P1.17@1952,103
IOA9: IC1.51 P1.18 | length 1313.9
  Top Layer w10: IC1.51@1233.89,873 1234.8,872.09 1234.8,730.2 1632,333 1982,333 2002,313 2002,153 P1.18@2052,103
IOA10: IC1.55 P1.19 | length 1346.1
  Top Layer w10: IC1.55@1312.63,873 1313.54,872.09 1313.54,691.46 1642,363 2032,363 2102,293 2102,153 P1.19@2152,103
IOA11: IC1.56 P1.20 | length 1390.9
  Top Layer w10: IC1.56@1332,872.68 1333.22,871.46 1333.22,701.78 1642,393 2052,393 2202,243 2202,193 2252,143 P1.20@2252,103
IOA12: IC1.57 P2.1 | length 1320.5
  Top Layer w10: IC1.57@1351.73,872.83 1352.64,873.73 1352.64,743.73 1412.64,683.73 v1(1412.64,673.73)
  Bottom Layer w10: v1@1412,673 1432,673 1492,733 1572,733 1610,695 1610,663.89 1940.89,333 2142,333 P2.1@2252,223
IOA13: IC1.58 P2.2 | length 1195.3
  Top Layer w10: IC1.58@1372.32,873.73 1372.32,771.55 1467.46,676.41 1479.96,676.41 v1(1482.64,673.73)
  Bottom Layer w10: v1@1482,673 1522,713 1562,713 1582,693 1582,653 1922,313 2112,313 2152,273 P2.2@2152,223
IOA14: IC1.61 P2.3 | length 1000.6
  Top Layer w10: IC1.61@1431.38,873.73 1431.38,811.49 1512.64,730.23 1512.64,643.73 1552.64,603.73 v1(1552.64,598.73) ; P2.3@2032,223 P2.3@2052,223
  Bottom Layer w10: v1@1552,598 1598.21,598 1908.21,288 1987,288 P2.3@2052,223
IOA15: IC1.62 P2.4 | length 942.5
  Top Layer w10: IC1.62@1451.06,873.73 1450.16,872.83 1451.06,871.92 1451.06,825.31 1552.64,723.73 v1(1552.64,673.73) ; P2.4@1947.47,218.47 P2.4@1952,223
  Bottom Layer w10: v1@1552,673 1522,643 1522,563 1802,283 1882,283 1942,223 P2.4@1952,223
IOA16: IC1.66 P2.7 | length 1871.4
  Top Layer w10: IC1.66@1529.8,873.73 1529.8,817.68 1632.64,714.84 v1(1632.64,673.73)
  Bottom Layer w10: v1@1632,673 1642,673 1962,353 2162,353 2222,293 2292,293 2322,263 2322,193 2302,173 1702,173 P2.7@1652,223
IOA17: IC1.67 P2.8 | length 2018.3
  Top Layer w10: IC1.67@1549.49,873.73 1549.22,873.47 1549.22,819.47 1647.64,721.06 1647.64,718.73 v1(1692.64,673.73) ; P2.8@1552,213 P2.8@1552,223
  Bottom Layer w10: P2.8@1552,223 1622,153 2322,153 2342,173 2342,283 2302,323 2222,323 2162,383 1982,383 v1@1692,673
IOA18: IC1.12 P2.9 | length 2116.9
  Top Layer w10: v1(687.64,1383.73) 687.64,1398.73 713.35,1424.44 IC1.12@880.67,1424.44
  Bottom Layer w10: v1@687,1383 682,1383 592,1293 592,523 692,423 1272,423 1452,243 P2.9@1452,223
IOA19: IC1.11 P2.10 | length 2093.9
  Top Layer w10: v1(652.64,1423.73) 673.03,1444.13 IC1.11@880.67,1444.13
  Bottom Layer w10: v1@652,1423 642,1413 642,1373 562,1293 562,513 672,403 1172,403 P2.10@1352,223
IOA20: IC1.10 P2.11 | length 2074.4
  Top Layer w10: v1(600.14,1383.73) 612.64,1396.23 612.64,1433.73 642.72,1463.81 IC1.10@880.67,1463.81
  Bottom Layer w10: v1@599.5,1383 599.5,1380.5 532,1313 532,513 672,373 1102,373 P2.11@1252,223 P2.11@1252.43,222.57
IOA21: IC1.9 P2.12 | length 2054.6
  Top Layer w10: v1(562.64,1423.73) 622.4,1483.5 IC1.9@880.67,1483.5
  Bottom Layer w10: v1@562,1423 562,1393 562.41,1392.59 562.41,1373.41 502,1313 502,503 652,353 1022,353 P2.12@1152,223 P2.12@1152.43,222.57
IOA22: IC1.8 P2.13 | length 2039.3
  Top Layer w10: v1(522.64,1383.73) 522.64,1433.73 592.09,1503.18 IC1.8@880.67,1503.18
  Bottom Layer w10: v1@522,1383 472,1333 472,493 642,323 952,323 P2.13@1052,223
IOA23: IC1.7 P2.14 | length 2030.9
  Top Layer w10: v1(482.64,1423.73) 482.64,1443.73 561.77,1522.87 IC1.7@880.67,1522.87
  Bottom Layer w10: v1@482,1423 482,1373 442,1333 442,483 632,293 892,293 952,233 P2.14@952,223
IOA24: IC1.6 P2.17 | length 1810.8
  Top Layer w10: v1(432.64,1383.73) 442.64,1393.73 442.64,1443.73 541.46,1542.55 IC1.6@880.67,1542.55
  Bottom Layer w10: v1@432,1383 432,1363 412,1343 412,473 652,233 P2.17@652,223
IOA25: IC1.5 P2.18 | length 1820
  Top Layer w10: v1(402.64,1433.73) 531.14,1562.24 IC1.5@880.67,1562.24
  Bottom Layer w10: v1@402,1433 392,1423 392,1353 382,1343 382,463 552,293 P2.18@552,223
IOA26: IC1.2 P2.19 | length 1857.1
  Top Layer w10: v1(352.64,1383.73) 352.64,1413.73 362.64,1423.73 362.64,1443.73 540.2,1621.29 IC1.2@880.67,1621.29
  Bottom Layer w10: v1@352,1383 352,453 452,353 P2.19@452,223
IOA27: IC1.1 P2.20 | length 1879.6
  Top Layer w10: v1(322.64,1433.73) 529.88,1640.98 IC1.1@880.67,1640.98
  Bottom Layer w10: v1@322,1438 322,1433 322,443 362,403 362,233 P2.20@352,223
IOB0: IC1.140 P4.7 | length 539.7
  Top Layer w10: P4.7@952,2223 952,2155 1037.04,2069.96 IC1.140@1037.04,1718.51
IOB1: IC1.139 P4.8 | length 515.5
  Top Layer w10: P4.8@1050.31,2241.5 P4.8@1056.72,2235.09 ; P4.8@1052,2223 1055.82,2219.18 1055.82,1719.42 IC1.139@1056.72,1718.51
IOB2: IC1.138 P4.9 | length 535.8
  Top Layer w10: IC1.138@1076.41,1718.51 1076.41,2065.41 1152,2141 P4.9@1152,2223
IOB3: IC1.137 P4.10 | length 601.3
  Top Layer w10: IC1.137@1096.09,1718.51 1096.09,2036.09 1167,2107 1222,2107 1252,2137 P4.10@1252,2223
IOB4: IC1.134 P4.11 | length 602.7
  Top Layer w10: IC1.134@1155.15,1718.51 1155.15,1758.85 1135,1779 1135,1931 1352,2148 P4.11@1352,2223
IOB5: IC1.133 P4.12 | length 675
  Top Layer w10: IC1.133@1174.83,1718.51 1174.83,1764.17 1155,1784 1155,1921 1357,2123 1424,2123 1452,2151 P4.12@1452,2223
IOB6: IC1.132 P4.13 | length 743.4
  Top Layer w10: IC1.132@1194.52,1718.51 1194.52,1771 1174,1791.52 1174,1910 1363,2099 1489,2099 1552,2162 P4.13@1552,2223
IOB7: IC1.131 P4.14 | length 812.6
  Top Layer w10: IC1.131@1214.42,1718.76 1214.42,1772.58 1194,1793 1194,1902 1372,2080 1560,2080 1652,2172 P4.14@1652,2223
IOB8: IC1.127 P4.17 | length 987.8
  Top Layer w10: IC1.127@1293.37,1719 1293.16,1718.76 1293.16,1763.74 1321,1791.58 1321,1898 1482,2059 1609,2059 1703,2153 1935,2153 1952,2170 P4.17@1952,2223
IOB9: IC1.126 P4.18 | length 1063.3
  Top Layer w10: IC1.126@1312.63,1718.51 1312.63,1762 1336,1785.37 1336,1890.21 1477.79,2032 1622,2032 1719,2129 2006,2129 2052,2175 P4.18@2052,2223
IOB10: IC1.124 P4.19 | length 1140.5
  Top Layer w10: IC1.124@1352,1718.51 1352.91,1719.42 1352.91,1885.91 1484,2017 1652,2017 1735,2100 2087,2100 2152,2165 P4.19@2152,2223
IOB11: IC1.123 P4.20 | length 1213.3
  Top Layer w10: IC1.123@1371.68,1718.51 1372.59,1719.42 1372.59,1869.09 1505.5,2002 1682,2002 1753,2073 2164,2073 2252,2161 P4.20@2252,2223
IOB12: IC1.95 P5.1 | length 1980.4
  Top Layer w10: v4(1445,1474) 1445.74,1474.74 1521.72,1474.74 1578.21,1418.24 1657.13,1418.24 1689.39,1385.98 1725.28,1385.98 IC1.95@1726.18,1385.07
  Bottom Layer w10: P5.1@350.31,2341.5 275,2266.2 275,2187 330,2132 525.5,2132 1196.5,1461 1428.21,1461 1441.21,1474 v4(1445,1474)
IOB13: IC1.94 P5.2 | length 2283.2
  Top Layer w10: v4(1498.18,1452.74) 1516.72,1452.74 1566.21,1403.24 1650.91,1403.24 1687.87,1366.29 1725.28,1366.29 IC1.94@1726.18,1365.39
  Bottom Layer w10: P5.2@450.31,2341.5 389.81,2402 310,2402 215,2307 215,2175 301,2089 547.29,2089 1190.29,1446 1491.5,1446 v4@1497.75,1452.25
IOB14: IC1.119 P5.3 | length 1340.6
  Top Layer w10: v4(1430.64,1788.73) 1450.16,1769.21 1450.16,1720.15 IC1.119@1451.06,1719.24
  Bottom Layer w10: P5.3@550.31,2341.5 606,2285.81 606,2172 686,2092 973,2092 1064,2001 1357.57,2001 1403,1955.57 1403,1810.94 1427.94,1786 v4@1430.43,1788.49
IOB15: IC1.118 P5.4 | length 1257.1
  Top Layer w10: v4(1433.64,1841.73) 1439.64,1835.73 1439.64,1825.24 1470.75,1794.13 IC1.118@1470.75,1719.24
  Bottom Layer w10: P5.4@650.31,2341.5 650.31,2331.69 699,2283 699,2178 759,2118 985,2118 1077,2026 1353.79,2026 1427,1952.79 1427,1847 v4@1433,1841
IOB16: IC1.117 P5.7 | length 982.9
  Top Layer w10: v4(1460.64,1896.73) 1460.64,1825.45 1490.43,1795.66 IC1.117@1490.43,1719.24
  Bottom Layer w10: P5.7@950.31,2341.5 950.31,2327.69 1002,2276 1002,2166 1111.36,2056.64 1344.36,2056.64 1442,1959 1442,1916.25 1460,1898.25 v4@1460,1896
IOB17: IC1.116 P5.8 | length 904.6
  Top Layer w10: v4(1490.64,1845.73) 1493.32,1843.05 1493.32,1821.23 1510.12,1804.43 IC1.116@1510.12,1719.24
  Bottom Layer w10: P5.8@1050.31,2341.5 1050.31,2306.69 1105,2252 1105,2164 1130,2139 1286,2139 1467.75,1957.25 1467.75,1932.75 1487,1913.5 1487,1912.58 1490,1909.58 v4@1490,1845
IOB18: IC1.115 P5.9 | length 799.8
  Top Layer w10: v4(1519.64,1898.73) 1519.64,1821.73 1529.8,1811.57 IC1.115@1529.8,1719.24
  Bottom Layer w10: P5.9@1150.31,2341.5 1150.31,2306.69 1198,2259 1198,2221.1 1251.1,2168 1285,2168 1502,1951 1502,1918.79 1519,1901.79 v4@1519,1898